# EAGLE board BeagleBone Blue (EAGLE 7.3.0)
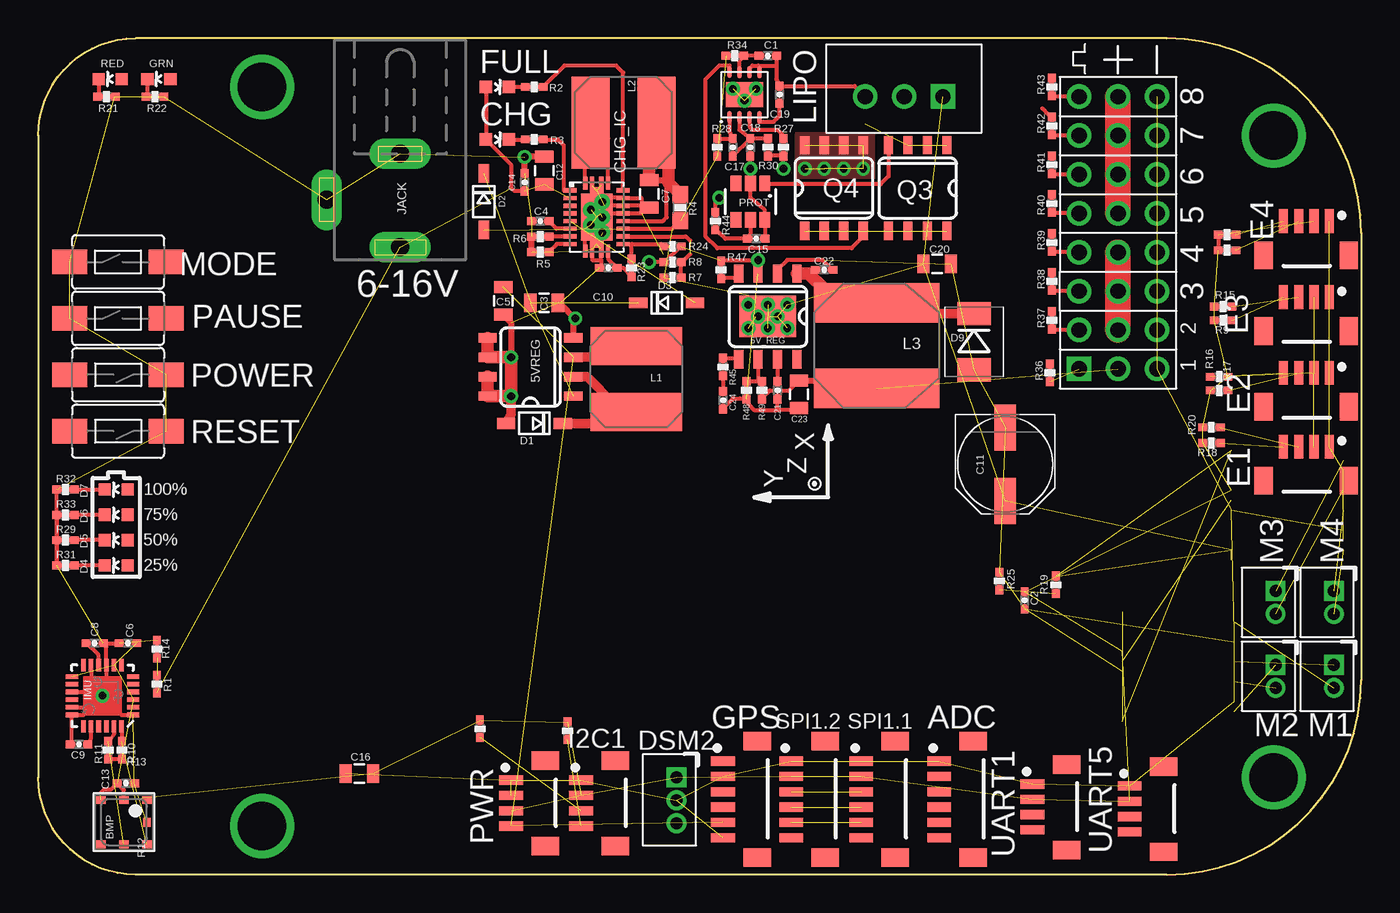
[diagram p0: board, top side]
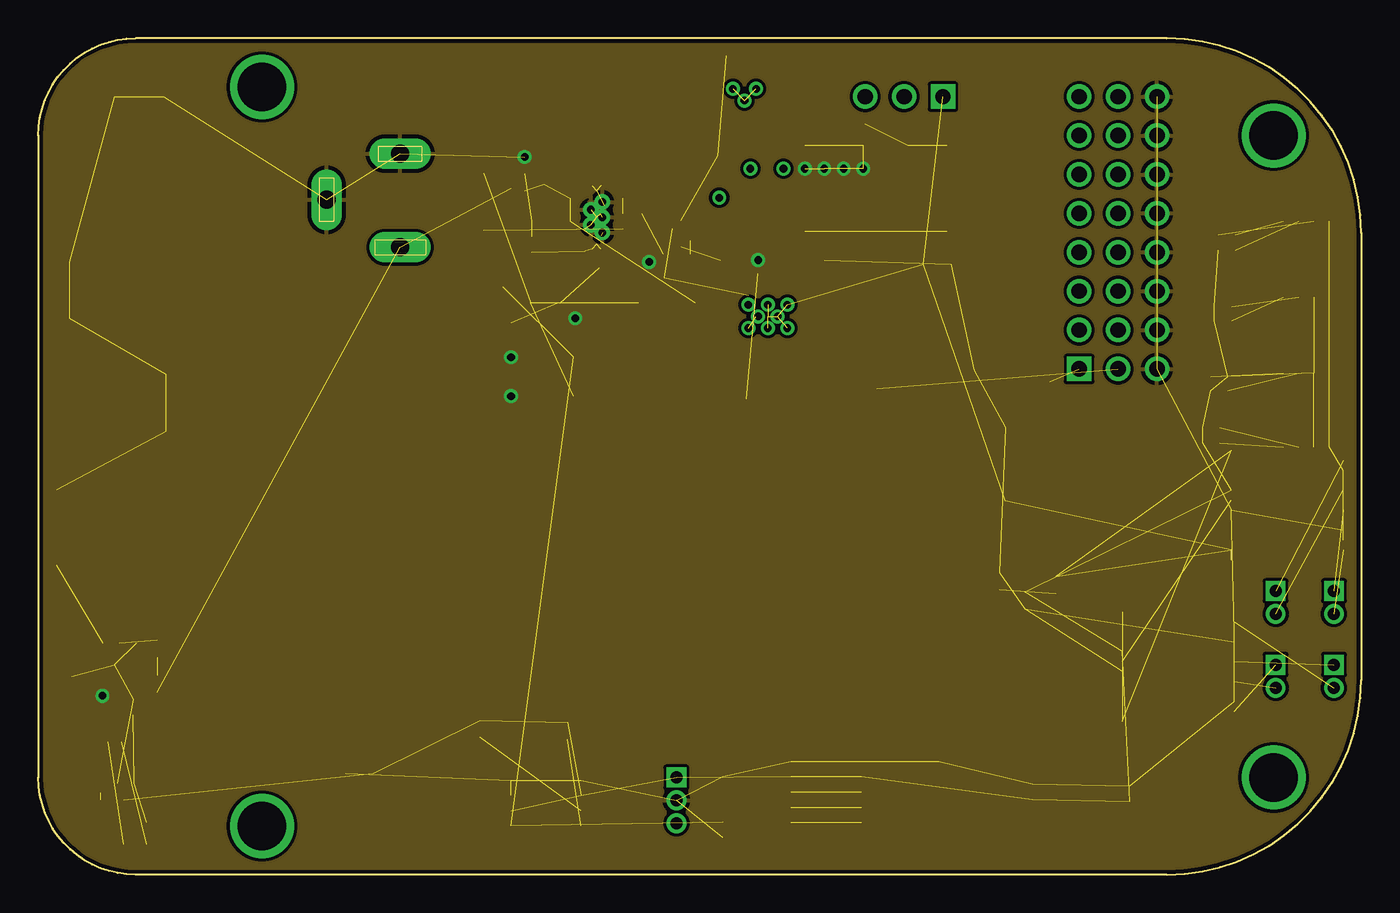
[diagram p1: board, inner layer Route2]
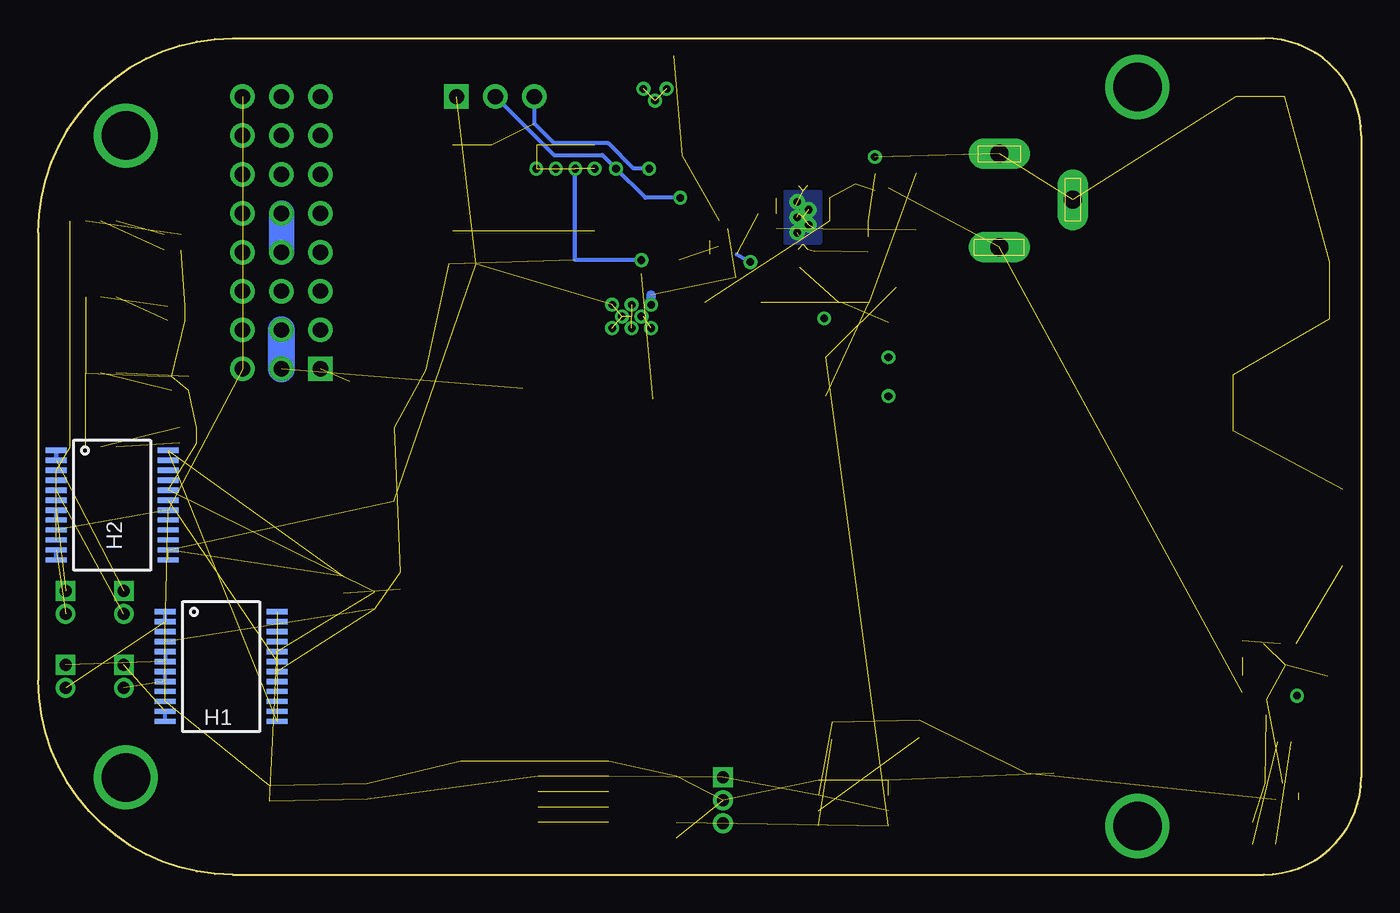
[diagram p2: board, bottom side, seen from below]

Size 86.36 x 54.61 mm. Coordinates in mm from the lower left corner, seen from the top.
Copper layers (1*2*3*4): Top 0.035mm / dielectric 1.5mm / Route2 0.035mm / dielectric 0.15mm / Route3 0.035mm / dielectric 0.2mm / Route4 0.035mm
Design rules "SparkFun *": minimum track width 8mil, minimum drill 20mil, track to track 8mil, track to pad 8mil, pad to pad 8mil, via to via 8mil, smd to smd 8mil, copper to edge 10mil, drill to drill 8mil, minimum pad ring 10mil, minimum via ring 8mil, stop-mask expansion 4mil, vias tented up to drill 25mil, thermal gap 10mil

## Footprints (pad centres in the part's own frame; a part is rotated, then mirrored left to right if it is on the bottom)
SO08-TIGHT = smd 0.6 x 1.2: 1 -1.905,-2.8; 2 -0.635,-2.8; 3 0.635,-2.8; 4 1.905,-2.8; 5 1.905,2.8; 6 0.635,2.8; 7 -0.635,2.8; 8 -1.905,2.8
SO08-EXPOSED = smd 0.6 x 1.2: 1 -1.905,-2.8; 2 -0.635,-2.8; 3 0.635,-2.8; 4 1.905,-2.8; 5 1.905,2.8; 6 0.635,2.8; 7 -0.635,2.8; 8 -1.905,2.8 | smd 3.683 x 2.718: 9 0,0
JST_SH_6 = smd 0.6 x 1.55: 1 5,0; 2 4,0; 3 3,0; 4 2,0; 5 1,0; 6 0,0 | smd 1.2 x 1.8: P$1 -1.3,-2.225; P$2 6.3,-2.225
8-SON_3X3MM = smd 0.305 x 0.813: 1 -0.965,-1.473; 2 -0.33,-1.473; 3 0.33,-1.473; 4 0.965,-1.473; 5 0.965,1.473; 6 0.33,1.473; 7 -0.33,1.473 | smd 0.305 x 0.787: 8 -0.965,1.473 | smd 2.4 x 1.651: PAD 0,0
BMP180 = smd 0.6 x 0.5: 1 1.5,1.45; 2 0,1.45; 3 -1.5,1.45; 4 -1.5,-1.45; 5 0,-1.45; 6 1.5,-1.45 | smd 0.5 x 0.6: 7 1.5,0
0402-CAP = smd 0.61 x 0.508: 1 -0.559,0; 2 0.559,0
0805 = smd 0.8 x 1.2: 1 -0.9,0; 2 0.9,0
PANASONIC_D = smd 3 x 1.4: + 2.4,0; - -2.4,0
LED-0603 = smd 0.8 x 0.8: A 0,-0.75; C 0,0.75
QFN20_3,5X4,5 = smd 0.85 x 0.28: 1 -2.225,-0.75; 10 2.225,-0.75; 11 2.225,0.75; 20 -2.225,0.75 | smd 0.28 x 0.85: 2 -1.75,-1.725; 3 -1.25,-1.725; 4 -0.75,-1.725; 5 -0.25,-1.725; 6 0.25,-1.725; 7 0.75,-1.725; 8 1.25,-1.725; 9 1.75,-1.725; 12 1.75,1.725; 13 1.25,1.725; 14 0.75,1.725; 15 0.25,1.725; 16 -0.25,1.725; 17 -0.75,1.725; 18 -1.25,1.725; 19 -1.75,1.725 | smd 3.05 x 2.05: EXP 0,0 | smd 1.125 x 0.28: EXP@7 -2.075,0.3; EXP@8 -2.075,-0.3; EXP@9 2.075,0.3; EXP@10 2.075,-0.3 | smd 0.45 x 0.4: EXP@11 -1.75,0; EXP@12 1.75,0 | drill 0.5 pad 0.3: GND@1 -1,0.373; GND@2 0,0.373; GND@3 1,0.373; GND@4 -0.492,-0.373; GND@6 0.492,-0.373
SOD-123 = smd 1.2 x 0.7: A 1.85,0; C -1.85,0
DO-214AA = smd 1.524 x 2.184: A 1.841,0; C -1.841,0
JST_ZH_3 = drill 0.787 square: P$1 0,0 | drill 0.787: P$2 1.499,0; P$3 2.997,0
JST_SH_4_SMD = smd 0.6 x 1.55: 1 0.46,1.27; 2 -0.54,1.27; 3 -1.54,1.27; 4 -2.54,1.27 | smd 1.2 x 1.8: P$1 -3.84,-0.955; P$2 1.728,-0.955
SSOP24 = smd 0.348 x 1.397: 1 -3.575,-3.656; 2 -2.925,-3.656; 3 -2.275,-3.656; 4 -1.625,-3.656; 5 -0.975,-3.656; 6 -0.325,-3.656; 7 0.325,-3.656; 8 0.975,-3.656; 9 1.625,-3.656; 10 2.275,-3.656; 11 2.925,-3.656; 12 3.575,-3.656; 13 3.575,3.656; 14 2.925,3.656; 15 2.275,3.656; 16 1.625,3.656; 17 0.975,3.656; 18 0.325,3.656; 19 -0.325,3.656; 20 -0.975,3.656; 21 -1.625,3.656; 22 -2.275,3.656; 23 -2.925,3.656; 24 -3.575,3.656
QFN-24-NP = smd 0.8 x 0.3: 1 -2,1.25; 2 -2,0.75; 3 -2,0.25; 4 -2,-0.25; 5 -2,-0.75; 6 -2,-1.25; 13 2,-1.25; 14 2,-0.75; 15 2,-0.25; 16 2,0.25; 17 2,0.75; 18 2,1.25 | smd 0.3 x 0.8: 7 -1.25,-2; 8 -0.75,-2; 9 -0.25,-2; 10 0.25,-2; 11 0.75,-2; 12 1.25,-2; 19 1.25,2; 20 0.75,2; 21 0.25,2; 22 -0.25,2; 23 -0.75,2; 24 -1.25,2
DCJ0303 = drill 1.181 pad 2 long: 1 0,3.1; 2 4.8,0; 3 0,-3
SRN6045 = smd 2.5 x 6: 1 -2.175,-0.175; 2 2.125,-0.175
8X8MM_INDUCTOR = smd 2.591 x 8.204: 1 -2.794,0; 2 2.794,0
JST_XH_3-PIN = drill 1 square: P$1 0,0 | drill 1: P$2 0,-2.54; P$3 0,-5.08
JST_ZH_2 = drill 0.787 pad 1.219 square: P$1 -0.749,0 | drill 0.787 pad 1.219: P$2 0.749,0
TACTILE-SWITCH-1101NE = smd 2.3 x 1.6: P$1 -3.15,0; P$2 3.15,0
SOT-236 = smd 0.991 x 0.711: 1 -1.194,0.94; 2 -1.194,0; 3 -1.194,-0.94; 4 1.194,-0.94; 5 1.194,0; 6 1.194,0.94
0402-RES = smd 0.61 x 0.508: 1 -0.559,0; 2 0.559,0
0603-RES = smd 1.1 x 1: 1 -0.85,0; 2 0.85,0
3X8_0.1"_HEADER = drill 1 square: P$1 -2.54,-17.78 | drill 1: P$2 -2.54,-15.24; P$3 -2.54,-12.7; P$4 -2.54,-10.16; P$5 -2.54,-7.62; P$6 -2.54,-5.08; P$7 0,-17.78; P$8 0,-15.24; P$9 0,-12.7; P$10 0,-10.16; P$11 0,-7.62; P$12 0,-5.08; P$13 2.54,-17.78; P$14 2.54,-15.24; P$15 2.54,-12.7; P$16 2.54,-10.16; P$17 2.54,-7.62; P$18 2.54,-5.08; P$19 -2.54,-2.54; P$20 -2.54,0; P$21 0,-2.54; P$22 0,0; P$23 2.54,-2.54; P$24 2.54,0

## Placement (x,y rotation side)
5VREG  AP1509SOIC-8-TIGHT  [SO08-TIGHT]  32.13,33.15 90 top
6V_REG  AOZ1284  [SO08-EXPOSED]  47.62,36.45 180 top
ADC  JST_SH_6  [JST_SH_6]  58.8,2.41 90 top
BAL  BQ29209  [8-SON_3X3MM]  46.1,50.93 0 top
BMP  BMP180  [BMP180]  5.59,3.43 0 top
C1  0.1uF  [0402-CAP]  47.62,53.47 0 top
C2  0.1uF  [0402-CAP]  64.39,17.91 90 top
C3  10uF 25V  [0805]  33.02,37.34 0 top
C4  0.1uF  [0402-CAP]  32.77,42.67 0 top
C5  10uF 25V  [0805]  30.35,37.47 270 top
C6  0.1uF  [0402-CAP]  5.84,15.11 180 top
C7  10uF 25V  [0805]  39.88,44.45 270 top
C8  0.1uF  [0402-CAP]  3.68,15.11 0 top
C9  2.2nF 50V  [0402-CAP]  2.67,8.51 180 top
C10  0.1uF  [0402-CAP]  37.21,39.62 0 top
C11  100uF 16V  [PANASONIC_D]  63.12,26.8 270 top
C12  10uF 25V  [0805]  33.02,45.97 90 top
C13  0.1uF  [0402-CAP]  5.71,5.97 0 top
C14  0.1uF  [0402-CAP]  31.75,45.21 270 top
C15  0.1uF  [0402-CAP]  46.86,41.53 180 top
C16  10uF 25V  [0805]  20.95,6.6 180 top
C17  0.1uF  [0402-CAP]  45.34,47.5 90 top
C18  0.1uF  [0402-CAP]  46.48,47.5 90 top
C19  0.1uF  [0402-CAP]  48.39,50.93 90 top
C20  10uF 25V  [0805]  58.67,39.88 180 top
C21  2.2nF 50V  [0402-CAP]  48.26,31.62 90 top
C22  0.1uF  [0402-CAP]  51.31,39.5 180 top
C23  10uF 25V  [0805]  49.66,31.37 90 top
C24  0.1uF  [0402-CAP]  44.7,30.99 90 top
CHG  YL  [LED-0603]  29.97,48.01 270 top
CHG_IC  BQ24125  [QFN20_3,5X4,5]  36.45,42.93 270 top
D1  [SOD-123]  32.38,29.46 180 top
D2  [SOD-123]  29.08,43.94 270 top
D3  [SOD-123]  41.02,37.34 0 top
D4  RED  [LED-0603]  5.08,20.19 90 top
D5  GREEN  [LED-0603]  5.08,21.84 90 top
D6  GREEN  [LED-0603]  5.08,23.5 90 top
D7  GREEN  [LED-0603]  5.08,25.15 90 top
D9  [DO-214AA]  61.09,34.8 270 top
DSM2  JST_ZH_3  [JST_ZH_3]  41.66,6.35 270 top
E1  JST_SH_4  [JST_SH_4_SMD]  83.82,26.67 0 top
E2  JST_SH_4  [JST_SH_4_SMD]  83.82,31.5 0 top
E3  JST_SH_4  [JST_SH_4_SMD]  83.82,36.45 0 top
E4  JST_SH_4  [JST_SH_4_SMD]  83.82,41.4 0 top
E$1  [BATTERY_INDICATOR]  5.08,22.61 270 top
FULL  GRN  [LED-0603]  29.97,51.44 270 top
GPS  JST_SH_6  [JST_SH_6]  44.7,2.41 90 top
GRN  GRN  [LED-0603]  7.87,51.94 90 top
H1  TB6621FNG  [SSOP24]  74.42,13.59 270 bottom
H2  TB6621FNG  [SSOP24]  81.53,24.13 270 bottom
I2C1  JST_SH_4  [JST_SH_4_SMD]  36.7,5.71 90 top
IMU  MPU-9150  [QFN-24-NP]  4.19,11.68 180 top
JACK  5.5x2.1mm  [DCJ0303]  23.62,44.07 180 top
L1  10uH  [SRN6045]  38.86,32.38 90 top
L2  10uH  [SRN6045]  38.23,49.28 0 top
L3  3.3uH  [8X8MM_INDUCTOR]  54.74,34.54 270 top
LIPO  [JST_XH_3-PIN]  59.05,50.8 270 top
M1  JST_ZH_2  [JST_ZH_2]  84.58,12.95 270 top
M2  JST_ZH_2  [JST_ZH_2]  80.77,12.95 270 top
M3  JST_ZH_2  [JST_ZH_2]  80.77,17.78 270 top
M4  JST_ZH_2  [JST_ZH_2]  84.58,17.78 270 top
MODE  SWITCH-MOMENTARY-2-SMD-1101NE  [TACTILE-SWITCH-1101NE]  5.21,40.01 0 top
PAUSE  SWITCH-MOMENTARY-2-SMD-1101NE  [TACTILE-SWITCH-1101NE]  5.21,36.32 0 top
POWER  SWITCH-MOMENTARY-2-SMD-1101NE  [TACTILE-SWITCH-1101NE]  5.21,32.64 180 top
PROT  S-8261  [SOT-236]  46.48,43.94 270 top
PWR  JST_SH_4  [JST_SH_4_SMD]  32.13,5.71 90 top
Q3  MOSFET-N  [SO08-TIGHT]  57.4,44.83 180 top
Q4  MOSFET-P  [SO08-TIGHT]  51.94,44.83 0 top
R1  47k  [0402-RES]  7.75,12.45 90 top
R2  698  [0402-RES]  32.38,51.44 180 top
R3  698  [0402-RES]  32.38,48.01 180 top
R4  0.1  [0603-RES]  41.91,43.56 90 top
R5  10k  [0402-RES]  32.77,40.64 0 top
R6  10k  [0402-RES]  32.77,41.66 0 top
R7  301k  [0402-RES]  41.4,38.99 0 top
R8  100k  [0402-RES]  41.4,40.01 180 top
R9  1K  [0402-RES]  77.34,36.2 180 top
R10  4.7k  [0402-RES]  5.46,8.13 90 top
R11  4.7k  [0402-RES]  4.57,8.13 270 top
R12  4.7k  [0402-RES]  28.83,9.53 90 top
R13  4.7k  [0402-RES]  34.54,9.4 270 top
R14  4.7k  [0402-RES]  7.75,14.73 90 top
R15  1K  [0402-RES]  77.34,37.08 180 top
R16  1K  [0402-RES]  77.09,32.51 0 top
R17  1K  [0402-RES]  77.09,31.62 180 top
R18  1K  [0402-RES]  76.58,28.19 180 top
R19  47k  [0402-RES]  66.42,18.92 270 top
R20  1K  [0402-RES]  76.58,29.21 180 top
R21  261  [0402-RES]  4.45,50.8 0 top
R22  261  [0402-RES]  7.62,50.8 0 top
R23  100k  [0402-RES]  38.73,39.62 90 top
R24  100k  [0402-RES]  41.4,41.02 0 top
R25  4.7k  [0402-RES]  62.74,19.18 90 top
R26  1K  [0402-RES]  77.6,41.78 180 top
R27  100  [0402-RES]  48.64,47.5 90 top
R28  160  [0402-RES]  44.32,47.5 90 top
R29  261  [0402-RES]  1.78,21.84 180 top
R30  261  [0402-RES]  47.62,47.5 90 top
R31  261  [0402-RES]  1.78,20.19 180 top
R32  261  [0402-RES]  1.78,25.15 180 top
R33  261  [0402-RES]  1.78,23.5 180 top
R34  100  [0402-RES]  45.47,53.47 0 top
R35  1K  [0402-RES]  77.6,40.77 180 top
R36  4.7k  [0402-RES]  66.04,32.77 270 top
R37  4.7k  [0402-RES]  66.17,36.2 270 top
R38  4.7k  [0402-RES]  66.17,38.73 270 top
R39  4.7k  [0402-RES]  66.17,41.27 270 top
R40  4.7k  [0402-RES]  66.17,43.81 270 top
R41  4.7k  [0402-RES]  66.17,46.35 270 top
R42  4.7k  [0402-RES]  66.17,48.9 270 top
R43  4.7k  [0402-RES]  66.17,51.44 270 top
R44  698  [0402-RES]  44.2,42.67 270 top
R45  47k  [0402-RES]  44.7,33.15 90 top
R47  100k  [0402-RES]  44.58,39.5 270 top
R48  10k  [0402-RES]  46.23,31.62 90 top
R49  65k  [0402-RES]  47.24,31.62 270 top
RED  RED  [LED-0603]  4.7,51.94 90 top
RESET  SWITCH-MOMENTARY-2-SMD-1101NE  [TACTILE-SWITCH-1101NE]  5.21,28.96 180 top
SPI1.1  JST_SH_6  [JST_SH_6]  53.72,2.41 90 top
SPI1.2  JST_SH_6  [JST_SH_6]  49.15,2.41 90 top
U$1  SERVO_HEADERS_8X  [3X8_0.1"_HEADER]  70.48,50.8 0 top
U$5  [XYZ_BIG]  51.56,24.64 90 top
U$7  [BEAGLEBONE_BLUE_NO_HOLES]  0,54.61 270 top
UART1  JST_SH_4  [JST_SH_4_SMD]  66.17,5.46 90 top
UART5  JST_SH_4  [JST_SH_4_SMD]  72.52,5.33 90 top

## Library data of the parts
5VREG 6V_REG ADC BAL C1 C2 C4 C6 C8-C10 C13-C15 C17-C19 C21 C22 C24 D9 DSM2 E1-E4 E$1 GPS I2C1 L3 LIPO M1-M4 PROT PWR Q3 Q4 R1-R3 R5-R45 R47-R49 SPI1.1 SPI1.2 U$1 U$5 U$7 UART1 UART5 = Strawson_Eagle_Lib
BMP IMU = SparkFun-Sensors
C3 C5 C7 C12 C16 C20 C23 = SparkFun-Capacitors
C11 D1-D3 = adafruit
CHG D4-D7 FULL GRN RED = SparkFun-LED
CHG_IC = Strawson_Eagle_Lib; MPN: BQ24125RHLR; OC_FARNELL: 1536712; OC_NEWARK: 71M2021
H1 H2 = SparkFun
JACK = con-jack; OC_FARNELL: unknown; OC_NEWARK: unknown
L1 L2 = SparkFun-Passives; PROD_ID: NDUC-11627; VALUE: 33uH
MODE PAUSE POWER RESET = SparkFun-Electromechanical
R4 = SparkFun-Resistors

## Nets
3.3V: BMP.2 BMP.3 C2.2 C6.1 C13.1 C16.1 DSM2.P$1 E1.2 E2.2 E3.2 E4.2 H1.20 H2.20 I2C1.2 IMU.3 IMU.8 IMU.13 PWR.3 R9.2 R10.1 R11.2 R12.2 R13.1 R15.2 R16.2 R17.2 R18.2 R20.2 R26.2 R35.2 SPI1.1.2 SPI1.2.2 UART1.2 UART5.2
5.0V: 5VREG.3 C5.1 GPS.5 L1.2 PWR.4
AIN0: ADC.3
AIN1: ADC.4
AIN2: ADC.5
AIN3: ADC.6
BATT_MID: LIPO.P$2 R27.1 R30.1 R44.1
BATT_MINUS: BAL.5 BAL.6 C1.2 C15.1 C18.1 C19.2 LIPO.P$3 PROT.2 PROT.6 Q3.1 Q3.2 Q3.3
CO: BAL.8 Q4.4
DO: PROT.1 Q3.4
GND: 5VREG.4 5VREG.5 5VREG.6 5VREG.7 5VREG.8 6V_REG.3 ADC.1 BMP.7 C2.1 C3.2 C4.1 C5.2 C6.2 C7.2 C8.2 C9.2 C10.1 C11.- C12.2 C13.2 C14.1 C16.2 C20.1 C21.1 C23.1 C24.1 CHG_IC.10 CHG_IC.16 CHG_IC.17 CHG_IC.18 CHG_IC.EXP CHG_IC.EXP@7 CHG_IC.EXP@8 CHG_IC.EXP@9 CHG_IC.EXP@10 CHG_IC.EXP@11 CHG_IC.EXP@12 CHG_IC.GND@1 CHG_IC.GND@2 CHG_IC.GND@3 CHG_IC.GND@4 CHG_IC.GND@6 D1.A D9.A DSM2.P$2 E1.1 E2.1 E3.1 E4.1 GPS.2 GPS.6 H1.3 H1.4 H1.9 H1.10 H1.18 H2.3 H2.4 H2.9 H2.10 H2.18 I2C1.1 IMU.1 IMU.9 IMU.11 IMU.15 IMU.17 IMU.18 JACK.2 JACK.3 MODE.P$1 PAUSE.P$1 POWER.P$1 PWR.1 PWR.2 Q4.5 Q4.6 Q4.7 Q4.8 R5.1 R6.1 R8.2 R14.2 R21.2 R22.2 R24.2 R25.2 R29.2 R31.2 R32.2 R33.2 R47.1 R48.1 RESET.P$1 SPI1.1.1 SPI1.2.1 U$1.P$13 U$1.P$14 U$1.P$15 U$1.P$16 U$1.P$17 U$1.P$18 U$1.P$23 U$1.P$24 UART1.1 UART5.1
I2C1_SCL: I2C1.3 R12.1
I2C1_SDA: I2C1.4 R13.2
I2C2_SCL: BMP.5 IMU.23 R11.1
I2C2_SDA: BMP.6 IMU.24 R10.2
IMU_INT: IMU.12
L3: D6.C R33.1
L4: D7.C R32.1
LED_1: D4.A
LED_2: D5.A
LED_3: D6.A
LED_4: D7.A
LED_GRN: GRN.A
LED_RED: RED.A
MDIR_1A: H1.21
MDIR_1B: H1.22
MDIR_2A: H1.17
MDIR_2B: H1.16
MDIR_3A: H2.21
MDIR_3B: H2.22
MDIR_4A: H2.17
MDIR_4B: H2.16
MODE_BTN: MODE.P$2
MOT1A: H1.1 H1.2 M1.P$2
MOT1B: H1.5 H1.6 M1.P$1
MOT2A: H1.11 H1.12 M2.P$1
MOT2B: H1.7 H1.8 M2.P$2
MOT3A: H2.1 H2.2 M3.P$1
MOT3B: H2.5 H2.6 M3.P$2
MOT4A: H2.11 H2.12 M4.P$2
MOT4B: H2.7 H2.8 M4.P$1
MOT_STBY: H1.19 H2.19
N$1: R36.2 U$1.P$1
N$3: GRN.C R22.1
N$4: BAL.2 C17.1 C18.2 R30.2
N$6: R21.1 RED.C
N$8: BAL.1 C17.2 R28.2
N$9: FULL.C R2.2
N$10: 6V_REG.7 C21.2
N$11: C15.2 PROT.5 R44.2
N$12: CHG_IC.1 CHG_IC.20 L2.1
N$13: C7.1 CHG_IC.15 L2.2 R4.2
N$14: C8.1 IMU.10
N$15: C9.1 IMU.20
N$16: 5VREG.2 D1.C L1.1
N$17: CHG.C R3.2
N$18: CHG_IC.2 R3.1
N$21: Q3.5 Q3.6 Q3.7 Q3.8 Q4.1 Q4.2 Q4.3
N$23: CHG_IC.19 R2.1
N$24: BAL.4 C19.1
N$25: R37.2 U$1.P$2
N$28: C10.2 CHG_IC.11 R23.1
N$29: BAL.7 C1.1 R34.2
N$30: R38.2 U$1.P$3
N$31: CHG_IC.12 R23.2 R24.1
N$35: CHG_IC.9 R5.2
N$36: CHG_IC.13 R7.2 R8.1
N$37: CHG_IC.8 R6.2
N$38: R39.2 U$1.P$4
N$46: C4.2 CHG_IC.7
N$48: D5.C R29.1
N$49: D4.C R31.1
N$50: BAL.3 R27.2
N$51: R40.2 U$1.P$5
N$52: R41.2 U$1.P$6
N$53: 6V_REG.2 C22.1
N$54: R42.2 U$1.P$19
N$56: R43.2 U$1.P$20
N$60: 6V_REG.1 C22.2 D9.C L3.1
N$61: 6V_REG.4 R47.2
N$62: C23.2 L3.2 R49.2 U$1.P$7 U$1.P$8 U$1.P$9 U$1.P$10 U$1.P$11 U$1.P$12 U$1.P$21 U$1.P$22
N$63: 6V_REG.5 R45.2
N$65: 6V_REG.6 R48.2 R49.1
N$66: C24.2 R45.1
N$79: 5VREG.1 C3.1 D2.C D3.C
PAUSE_BTN: PAUSE.P$2
PWM_1A: H1.23
PWM_1B: H1.15
PWM_2A: H2.23
PWM_2B: H2.15
PWR: POWER.P$2
QEP_0A: E1.3 R20.1
QEP_0B: E1.4 R18.1
QEP_1A: E2.3 R17.1
QEP_1B: E2.4 R16.1
QEP_2A: E3.3 R15.1
QEP_2B: E3.4 R9.1
QEP_4A: E4.3 R35.1
QEP_4B: E4.4 R26.1
RESET: RESET.P$2
SERVO_EN: 6V_REG.8
SPI1_MISO: SPI1.1.4 SPI1.2.4
SPI1_MOSI: SPI1.1.3 SPI1.2.3
SPI1_SCK: SPI1.1.5 SPI1.2.5
SPI1_SS1: SPI1.1.6
SPI1_SS2: SPI1.2.6
SVO1: R36.1
SVO2: R37.1
SVO3: R38.1
SVO4: R39.1
SVO5: R40.1
SVO6: R41.1
SVO7: R42.1
SVO8: R43.1
UART1_RX: UART1.3
UART1_TX: UART1.4
UART2_RX: GPS.3
UART2_TX: GPS.4
UART4_RX: DSM2.P$3
UART5_RX: UART5.3
UART5_TX: UART5.4
V_BATT: 6V_REG.9 C11.+ C20.2 CHG_IC.14 D2.A H1.13 H1.14 H1.24 H2.13 H2.14 H2.24 LIPO.P$1 R4.1 R7.1 R19.1 R28.1 R34.1
V_DIV_BAT: R19.2 R25.1
V_DIV_DC: R1.2 R14.1
VCC: C12.1 C14.2 CHG.A CHG_IC.3 CHG_IC.4 CHG_IC.6 D3.A FULL.A JACK.1 R1.1
VDD_ADC: ADC.2

## Tracks (layer width: path | path; a pad name or v marks a point on that pad's centre or on a via)
3.3V  (30 unrouted)
  Top 0.254: R11.2 R10.1 | BMP.2 5.59,5.51 C13.1 4.78,5.59 4.32,5.59 4.09,5.36 | R26.2 R35.2
5.0V  (3 unrouted)
  Top 0.61: 5VREG.3 38.56,33.78 L1.2
BALANCE_PAD  (via drill 0.5 pad 0.25)  (2 unrouted)
  other vias: 45.34,51.31 46.1,50.55 46.86,51.31
BATT_MID  (via drill 0.5)
  Top 0.254: v48.64,46.1 R27.1 R30.1 | R44.1 44.2,43.94 v44.45,44.2
  Bottom 0.254: v44.45,44.2 46.74,44.2 v48.64,46.1 49.53,46.99 52.7,46.99 LIPO.P$2
BATT_MINUS  (via drill 0.5)  (3 unrouted)
  Top 0.254: C15.1 PROT.6 47.42,43.38 46.48,44.2 PROT.2 v46.48,46.1 C18.1 | C1.2 48.18,52.83 | 48.18,52.83 48.18,51.94 C19.2 53.29,51.49 LIPO.P$3 | BAL.6 46.43,52.65 46.61,52.83 46.99,52.83 | 46.99,52.83 48.18,52.83 | BAL.5 47.07,52.76 46.99,52.83
  Bottom 0.254: v46.48,46.1 47.5,46.1 49.15,47.75 52.7,47.75 53.98,49.02 LIPO.P$3
CO
  Top 0.254: Q4.4 53.85,41.66 53.09,40.89 44.32,40.89 43.56,41.66 43.56,51.94 44.45,52.83 45.14,52.83 BAL.8
DO
  Top 0.254: Q3.4 55.5,45.59 54.99,45.09 47.73,45.09 PROT.1
GND  (via drill 0.5, 0.5 pad 0.25)  (82 unrouted)
  Top 0.254: IMU.17 3.16,10.93 | 3.16,10.93 3.3,10.79 | 3.3,10.79 3.56,10.54 4.32,10.54 | 4.32,10.54 5.33,10.54 5.44,10.43 IMU.1 | IMU.18 2.94,10.43 3.3,10.79 | 4.32,10.54 4.44,10.66 v4.19,11.68 4.44,11.94 IMU.9 4.44,14.88 C8.2 C6.2 | IMU.15 3.3,11.93 3.3,11.94 | 3.3,11.94 3.3,11.07 3.16,10.93 | IMU.11 3.44,12.08 3.3,11.94 | R33.2 R32.2 R29.2 | C9.2 2.19,8.72 IMU.18 | 39.37,43.68 36.94,43.68 | CHG_IC.10 35.7,42.18 | C24.1 45.34,31.1 45.81,31.1 R48.1 46.35,30.73 46.74,30.35 48.26,30.35 | 48.26,30.35 C21.1 | 49.65,30.48 C23.1 | R24.2 41.96,41 R8.2 v39.88,40.01 | 36.71,43.18 39.37,43.18 39.37,43.68 | 39.37,43.68 39.88,43.68 C7.2 | CHG_IC.18 39.37,44.18 39.37,43.68 | 2.17,10.41 IMU.18 | 6V_REG.3 v46.99,40.13 44.53,40.13 R47.1 | C23.1 49.66,30.35 | C23.1 49.54,30.35 48.26,30.35 | 36.75,40.13 36.75,39.72 C10.1 | CHG_IC.EXP@10 36.15,40.13 36.75,40.13 | 36.75,40.13 36.75,41.73
  Top 0.305: R31.2 R29.2 R33.2
  Top 0.406: R5.1 R6.1 | C12.2 31.76,46.87 v31.75,46.86 C14.1 | 5VREG.4 34.93,36.2 v35.05,36.32 34.05,37.33 C3.2 | C5.2 30.86,36.06 v30.86,33.78
  Top 0.61: D1.A 30.86,30.04 v30.86,31.24 | 30.87,33.79 v30.86,33.78
  Top 0.813: v4.19,11.68 3.94,11.68 | 5VREG.7 5VREG.8 v30.86,31.24 v30.86,33.78 5VREG.6 5VREG.5
  Bottom 0.254: v39.88,40.01 40.77,40.51 | v46.99,40.13 51.31,40.13 v51.31,46.1
  other vias: 53.85,46.1 52.58,46.1 50.04,46.1
  pour Route2 (rank 6): 0,54.61 19.68,54.61 20.07,54.74 54.1,54.74 57.28,54.86 74.93,54.86 86.49,54.61 86.49,-0.38 84.71,-0.38 72.01,-0.13 25.15,0.13 20.95,0 0,-0.13 0,20.83 -0.13,20.95 -0.13,39.37 0,39.37
  pour Bottom (rank 2, no thermals): 37.59,44.58 37.59,41.27 35.31,41.27 35.31,44.58
  pour Top (no thermals): 49.53,48.39 54.48,48.39 54.48,43.43 49.53,43.43
I2C1_SCL  (1 unrouted)
I2C1_SDA  (1 unrouted)
I2C2_SCL  (1 unrouted)
  Top 0.254: 4.95,9.67 IMU.23 4.94,9.18 R11.1
I2C2_SDA  (1 unrouted)
  Top 0.254: IMU.24 5.44,8.71 R10.2
L3
  Top 0.254: D6.C R33.1
L4
  Top 0.254: R32.1 4.32,25.15 4.45,25.4 D7.C
MOT1A  (1 unrouted)
  Bottom 0.254: H1.2 H1.1
MOT1B  (1 unrouted)
  Bottom 0.254: H1.5 H1.6
MOT2A  (1 unrouted)
  Bottom 0.254: H1.12 H1.11
MOT2B  (1 unrouted)
  Bottom 0.254: H1.8 H1.7
MOT3A  (1 unrouted)
  Bottom 0.305: H2.1 H2.2
MOT3B  (2 unrouted)
MOT4A  (1 unrouted)
  Bottom 0.305: H2.11 H2.12
MOT4B  (1 unrouted)
  Bottom 0.305: H2.7 H2.8
MOT_STBY  (1 unrouted)
N$1  (1 unrouted)
N$3
  Top 0.254: GRN.C 7.12,50.86 R22.1
N$4
  Top 0.254: C17.1 C18.2 | R30.2 C18.2 | BAL.2 45.77,48.64 C18.2
N$6
  Top 0.254: RED.C 3.95,50.86 R21.1
N$7
  Top 0.254: 38.23,44.2 36.96,44.2
N$8
  Top 0.254: BAL.1 45.14,48.49 C17.2 R28.2
N$9
  Top 0.254: FULL.C R2.2
N$10
  Top 0.254: 6V_REG.7 C21.2
N$11
  Top 0.254: PROT.5 46.48,41.8 C15.2 44.85,41.53 R44.2
N$12
  Top 0.254: CHG_IC.1 35.7,48.62 L2.1 37.2,48.08 CHG_IC.20
N$13
  Top 0.254: CHG_IC.15 40.77,42.68 41.02,42.93 41.02,46.48
  Top 0.406: C7.1 41.03,45.35 41.15,45.47 41.15,46.35 | 41.15,46.35 41.15,47.5 40.77,47.88 40.77,48.69 L2.2 | 41.15,46.35 41.02,46.48
  Top 0.813: C7.1 39.88,49.1 | R4.2 41.15,45.17 41.15,45.47 41.15,47.62
N$14
  Top 0.254: IMU.10 3.94,14.35 3.17,15.11 C8.1
N$15
  Top 0.254: C9.1 3.44,8.89 IMU.20
N$16
  Top 0.61: D1.C 38.55,29.46 L1.1 38.51,30.73 37.59,30.73 35.81,32.51 5VREG.2
N$17
  Top 0.254: CHG.C R3.2
N$18
  Top 0.254: R3.1 33.91,48.01 34.29,47.62 34.29,44.68 CHG_IC.2
N$21  (6 unrouted)
N$23
  Top 0.254: CHG_IC.19 38.17,52.38 37.72,52.83 34.34,52.83 R2.1
N$24
  Top 0.254: BAL.4 47.07,49.15 48.01,49.15 48.39,49.53 C19.1
N$25
  Top 0.254: U$1.P$2 66.24,35.56 R37.2
N$28
  Top 0.254: R23.1 38.18,39.62 C10.2 37.2,40.2 CHG_IC.11
N$29
  Top 0.254: BAL.7 45.77,53.09 R34.2 C1.1
N$30
  Top 0.254: U$1.P$3 66.24,38.1 R38.2
N$31
  Top 0.254: CHG_IC.12 38.73,41.18 | 38.73,41.18 40.65,41.18 R24.1 | R23.2 38.73,41.18
N$35
  Top 0.254: 33.4,40.64 R5.2 33.86,41.18 CHG_IC.9
N$36  (1 unrouted)
  Top 0.254: 42.55,40.51 42.04,40.01 R8.1 R7.2 | CHG_IC.13 42.27,41.68 42.55,41.4
N$37
  Top 0.254: 33.4,41.66 R6.2 33.34,41.68 CHG_IC.8
N$38
  Top 0.254: U$1.P$4 66.24,40.64 R39.2
N$46
  Top 0.254: CHG_IC.7 33.82,42.18 C4.2
N$48
  Top 0.254: D5.C R29.1
N$49
  Top 0.254: D4.C R31.1
N$50
  Top 0.254: BAL.3 46.43,48.82 46.61,48.64 48.26,48.64 48.64,48.26 R27.2
N$51
  Top 0.254: U$1.P$5 66.24,43.18 R40.2
N$52
  Top 0.254: U$1.P$6 66.24,45.72 R41.2
N$53
  Top 0.254: C22.1 51.82,39.5 51.18,40.13 48.9,40.13 48.26,39.5 6V_REG.2
N$54
  Top 0.254: U$1.P$19 66.24,48.26 R42.2
N$55  (via drill 3.17)
  other vias: 14.61,51.44
N$56
  Top 0.254: U$1.P$20 66.24,50.8 R43.2
N$60
  Top 0.254: C22.2 50.53,39.5 50.29,39.25
  Top 0.406: 51.44,37.34 L3.1 55.31,36.77
  Top 0.61: D9.C 55.56,36.64 L3.1
  Top 0.813: 6V_REG.1 50.29,39.25 51.31,38.23 51.31,37.47 51.44,37.34
N$61
  Top 0.254: R47.2 45.8,38.94 45.8,39.17 6V_REG.4
N$62  (1 unrouted)
  Top 0.254: R49.2 47.37,31.24 47.75,31.62 49.01,31.62 C23.2
  Top 0.406: C23.2 54.22,32.27 L3.2
  Top 1.676: U$1.P$22 U$1.P$21 U$1.P$12 U$1.P$11 | U$1.P$10 U$1.P$9 U$1.P$8
  Bottom 1.676: U$1.P$11 U$1.P$10
  Bottom 1.778: U$1.P$7 U$1.P$8
N$63
  Top 0.254: 6V_REG.5 45.66,33.71 R45.2
N$65
  Top 0.254: R49.1 46.99,32.18 | 46.99,32.18 R48.2 | 6V_REG.6 46.99,32.18
N$66
  Top 0.254: R45.1 C24.2
N$67  (via drill 3.17)
  other vias: 14.61,3.17
N$68  (via drill 3.17)
  other vias: 80.64,48.26
N$69  (via drill 3.17)
  other vias: 80.64,6.35
N$79  (3 unrouted)
QEP_0A  (1 unrouted)
QEP_0B  (1 unrouted)
QEP_1A  (1 unrouted)
QEP_1B  (1 unrouted)
QEP_2A  (1 unrouted)
QEP_2B  (1 unrouted)
QEP_4A  (1 unrouted)
QEP_4B  (1 unrouted)
SPI1_MISO  (1 unrouted)
SPI1_MOSI  (1 unrouted)
SPI1_SCK  (1 unrouted)
SVO7
  Top 0.254: 65.53,50.04 65.91,49.66 66.18,49.53 R42.1
V_BATT  (via drill 0.5 pad 0.25)  (21 unrouted)
  Top 0.254: CHG_IC.14 41.38,42.18 R4.1
  Top 0.406: 46.85,36.45 v46.99,36.45 6V_REG.9
  Top 0.61: 6V_REG.9 47.12,36.45 v46.35,37.21
  Bottom 0.61: v46.35,37.21 46.35,37.85
  other vias: 47.62,37.21 48.9,37.21 48.26,36.45 46.35,35.69 47.62,35.69 48.9,35.69
V_DIV_BAT  (1 unrouted)
V_DIV_DC  (1 unrouted)
VCC  (7 unrouted)
  Top 0.254: FULL.A CHG.A 30.86,46.37 30.86,44.83 31.06,44.65 C14.2
(copper drawn outside any net)
  shapes: Top area x1

## Text on the board
tPlace: 6-16V